# Altium PCB 24V-12V.PcbDoc
Units mm, origin at the board's own origin, x right, y up, seen from the top; angles counter-clockwise.
Board outline 50.6 x 38 mm, 2 copper layers (Top Layer, Bottom Layer); 35 components, 20 nets, 92 pads, 24 vias.
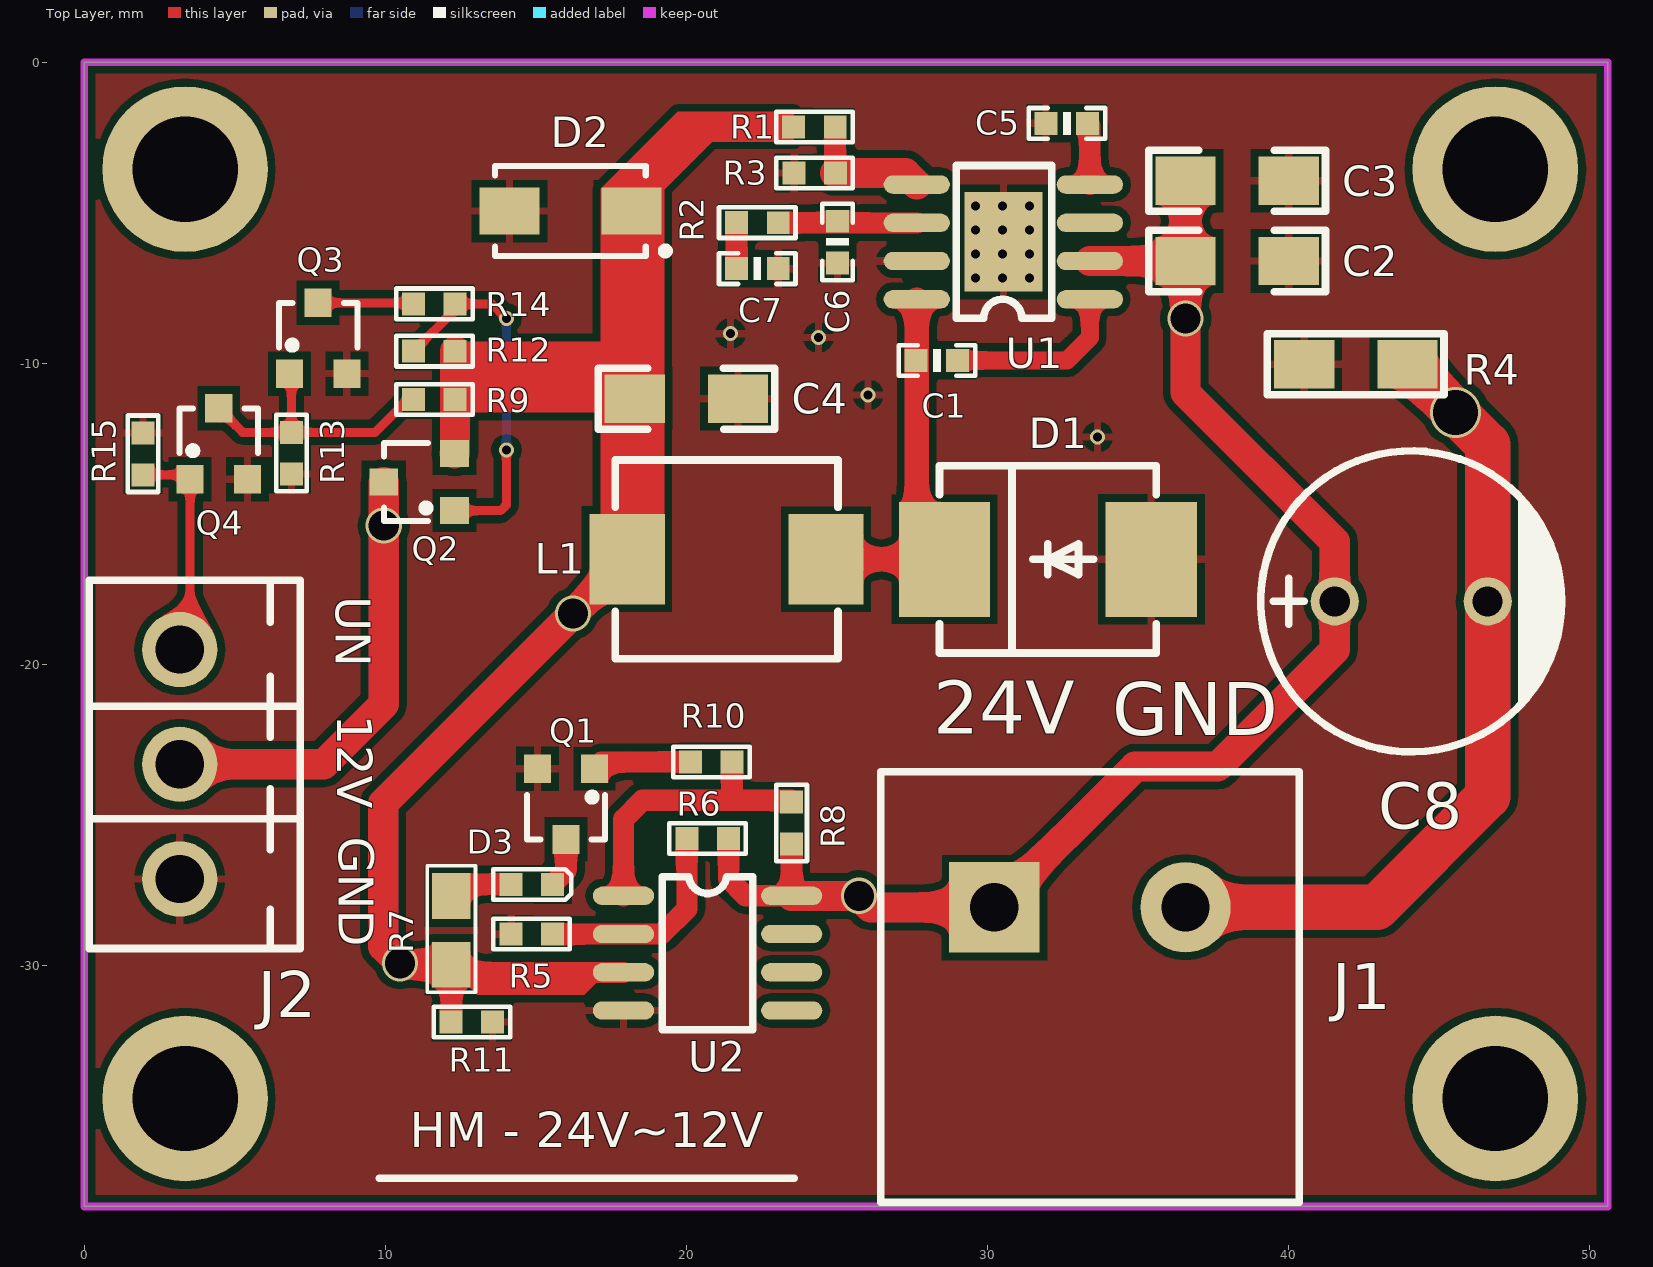
[diagram p0: Top Layer view]
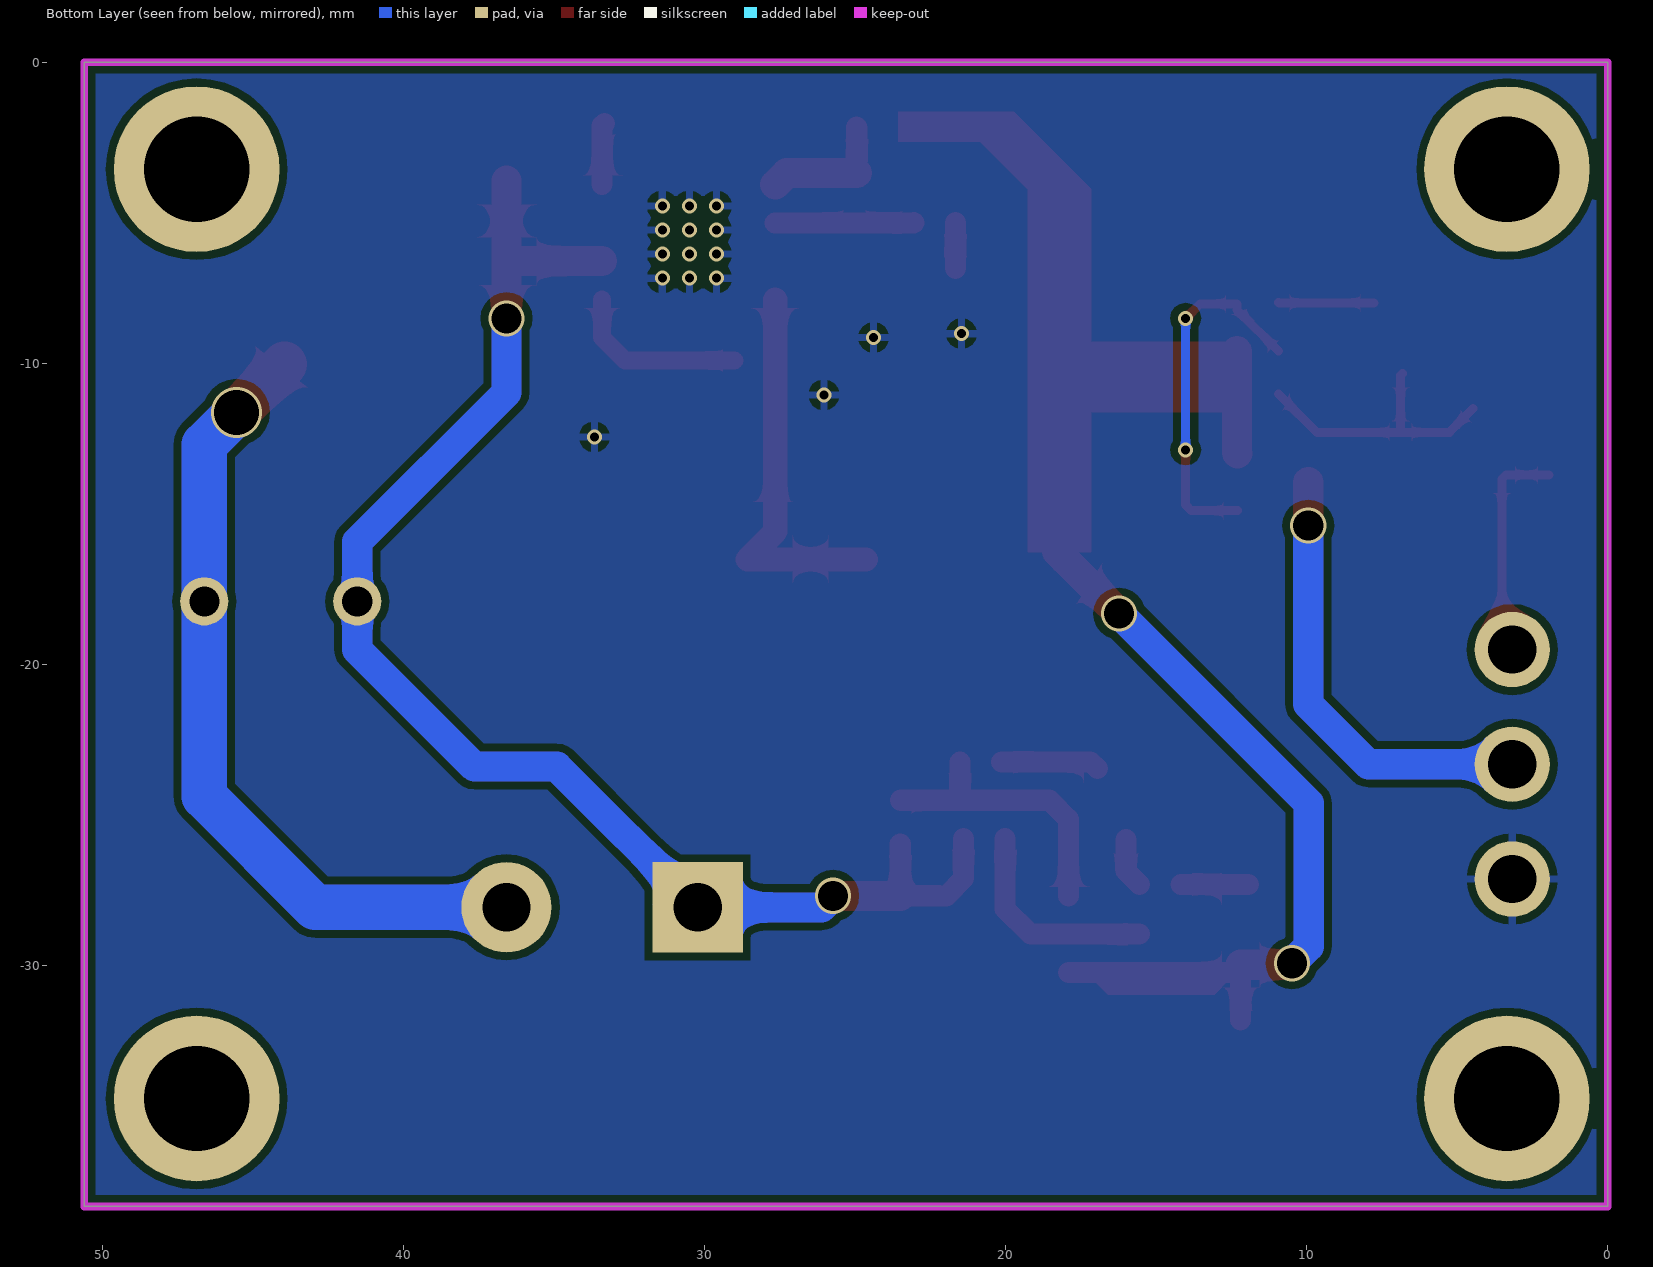
[diagram p1: Bottom Layer view, seen from below]

## Layer stack, top to bottom
Top Solder: solder mask 0.0102, Solder Resist, Dk 3.5
Top Layer: signal copper 0.0356
Dielectric 1: dielectric 0.32, FR-4, Dk 4.8
Bottom Layer: signal copper 0.0356
Bottom Solder: solder mask 0.0102, Solder Resist, Dk 3.5

## Board outline
0,-38 50.6,-38 50.6,0 0,0

## Design rules (kind name [scope] priority, off if disabled: settings)
Clearance [All] p1: gap=0.254
PolygonConnect [All] p1: connectstyle=Relief reliefconductorwidth=0.254 reliefentries=4 polygonreliefangle="90 Angle" airgapwidth=0.254
RoutingVias [All] p1: holewidth=0.3 width=0.5 viastyle="Through Hole" minholewidth=0.3 minwidth=0.5 maxholewidth=1 maxwidth=1.5
SolderMaskExpansion [All] p1: expansion=0.102
Width [All] p1: maxlimit=2 minlimit=0.254 preferedwidth=0.254
30 further rules are at their usual default settings.

## Components (designator, comment, footprint, x,y, rotation, side; value= is the part's Value field where it differs from the comment)
C1 "100NF/50V" 0603_C 28.321,-9.906 r180 top
C2 "10UF/50V" 1206_C 40.005,-6.604 r180 top
C3 "10UF/50V" 1206_C 40.005,-3.937 r180 top
C4 "22UF/25V" 1206_C 21.717,-11.176 r180 top
C5 "8.2NF/50V" 0603_C 32.639,-2.032 r180 top
C6 "10PF/50V" 0603_C 25.019,-5.969 r270 top
C7 "1NF/50V" 0603_C 22.352,-6.858 r0 top
C8 "470UF/35V" EC-DIP_BD10.0-P5.00-D1.0-FD 44.069,-17.907 r0 top
D1 "SK104" SMC/DO214AB 32.004,-16.51 r180 top
D2 "SMAJ12A" SMA/DO214AC 15.85,-6.045 r0 top
D3 "LED红" 0603_D 14.859,-27.305 r0 top
J1 "SIP-2" HB611-6.35-2P 33.401,-28.067 r0 top
J2 "SIP-3" KF2EDGV-3.81-3P 3.175,-19.507 r90 top
L1 "12UH/3A" IND-SMD_0630 21.336,-16.51 r180 top
Q1 "BC817-40" SOT-23-3 16.002,-24.638 r180 top
Q2 "AO3401" SOT-23-3 11.125,-13.945 r90 top
Q3 "AO3400" SOT-23-3 7.772,-9.169 r0 top
Q4 "AO3400" SOT-23-3 4.47,-12.675 r0 top
R1 "10.2KΩ/1%" 0603_R 24.257,-2.159 r180 top
R2 "76.8KΩ/1%" 0603_R 22.352,-5.331 r0 top
R3 "732Ω/1%" 0603_R 24.257,-3.683 r0 top
R4 "0Ω" 1206_R 40.513,-10.033 r0 top
R5 "110KΩ" 0603_R 14.859,-28.956 r0 top
R6 "130KΩ" 0603_R 20.701,-25.781 r0 top
R7 "1.2KΩ" 0805_R 12.192,-27.686 r270 top
R8 "10KΩ" 0603_R 23.495,-25.273 r90 top
R9 "30KΩ/1%" 0603_R 11.633,-11.201 r180 top
R10 "1KΩ" 0603_R 20.828,-23.241 r180 top
R11 "130KΩ" 0603_R 12.878,-31.877 r180 top
R12 "30KΩ/1%" 0603_R 11.633,-9.601 r180 top
R13 "10KΩ/1%" 0603_R 6.883,-12.979 r270 top
R14 "30KΩ/1%" 0603_R 11.633,-8.026 r180 top
R15 "30KΩ/1%" 0603_R 1.956,-13.005 r270 top
U1 "TPS54331" SO-8-POWERPAD（1.27/3.8*5） 33.401,-7.874 r180 top
U2 "DUAL OPAMP" SO-8（1.27/3.8*5） 17.907,-27.686 r0 top

## Footprints (in the part's own frame and the unit in brackets; to place one, negate y for a bottom-side part, rotate by r counter-clockwise, add the part's x,y. Pads: shape width x height; smd on the part's side, far side on the other; paste and mask are expansions set on the pad)
0603_C [mil] "电容"
  rect 30x30 smd: 1(-27,0) 2(27.5,-0.06)
  silkscreen extent -50,-20 50,20
0603_D [mil] "贴片发光二极管"
  rect 30x30 smd: 1(-27,0) 2(27.5,-0.06)
  silkscreen extent -50,-20 52,20
0603_R [mil] "电阻"
  rect 30x30 smd: 1(-27,0) 2(27.5,-0.06)
  silkscreen extent -50,-20 50,20
0805_R [mil] "电阻"
  rect 60x50 smd: 1(0.11,0.06) 2(90.11,0.06)
  silkscreen extent -39,-31 126,32
1206_C [mm] "电容"
  rect 2x1.6 smd: 1(3.432,0.001) 2(0.003,0.001)
  silkscreen extent -1.22,-1.02 4.65,1.02
1206_R [mm] "电阻"
  rect 2x1.6 smd: 1(3.432,0.001) 2(0.003,0.001)
  silkscreen extent -1.22,-1.02 4.65,1.02
EC-DIP_BD10.0-P5.00-D1.0-FD [mm] "直插电解电容"
  round 1.6 hole 1: 1(-2.54,0) 2(2.54,0)
  silkscreen extent -4.99,-5 5.08,5
HB611-6.35-2P [mm]
  rect 3x3 hole 1.6 mask+0.051: 1(-3.175,0)
  round 3 hole 1.6 mask+0.051: 2(3.175,0)
  silkscreen extent -6.95,-9.8 6.95,4.5
IND-SMD_0630 [mm]
  rect 2.5x3 smd: 1(-3.302,0) 2(3.302,0)
  silkscreen extent -3.7,-3.3 3.7,3.3
KF2EDGV-3.81-3P [mm]
  round 2.5 hole 1.6: 1(-7.62,0) 2(-3.81,0) 3(0,0)
  silkscreen extent -9.93,-4 2.3,3
SMA/DO214AC [mm] "二极管"
  rect 2x1.55 smd: 1(-1.725,1.1) 2(2.325,1.1)
  silkscreen extent -2.2,-0.4 3.57,2.6, body extent -2.2,-0.4 2.8,2.6, height 2.69
SMC/DO214AB [mm]
  rect 3.03x3.82 smd: 1(-3.435,0) 2(3.435,0)
  silkscreen extent -3.6,-3.11 3.6,3.11
SO-8-POWERPAD（1.27/3.8*5） [mm]
  oval 2.2x0.61 smd: 1(0.003,0.001) 2(0.003,-1.269) 3(0.003,-2.539) 4(0.003,-3.809) 5(5.75,-3.809) 6(5.75,-2.539) 7(5.75,-1.269) 8(5.75,0.001)
  rect 2.6x3.3 smd: 9(2.87,-1.905)
  silkscreen extent 1.27,-4.44 4.45,0.64
SO-8（1.27/3.8*5） [mil]
  oval 80x24 smd: 1(0.11,0.06) 2(0.11,-49.94) 3(0.11,-99.94) 4(0.11,-149.94) 5(220.11,-149.94) 6(220.11,-99.94) 7(220.11,-49.94) 8(220.11,0.06)
  silkscreen extent 51,-175 169,25
SOT-23-3 [mm]
  rect 0.9x0.95 smd: 1(-0.95,-1.175) 2(0.95,-1.175) 3(0,1.175)
  silkscreen extent -1.3,-0.35 1.3,1.18

## Part data
C1 C2 C3 C4 C5 C6 C7: library part CAP, "无极性电容"
C8: library part "CAP POLAR", "电解电容"
D1: library part Diodes, "肖特基二极管/10A"
D2: library part "Zener diode", "5V 单向TVS"
D3: library part LED, "发光二极管"
J1: "单排2P插座"
J2: "单排3P插座"
L1: library part INDUCTOR, "电感"
Q1: "NPN三极管"
Q2: library part MOSFET_P, "P-Channel MOSFET"
Q3 Q4: library part MOSFET-N, "N-Channel MOSFET"
R1 R2 R3 R4 R5 R6 R7 R8 R9 R10 R11 R12 R13 R14 R15: library part RES2, "电阻"
U1: library part TPS54531, "DC-DC/5A"
U2: "双运放"

## Free pads (board coordinates)
  round 5.5 hole 3.5: 10(3.353,-34.417) 11(3.353,-3.556) 12(46.863,-34.417) 13(46.863,-3.556)

## Via types
v1: diameter 0.5, hole 0.3, Top Layer to Bottom Layer, tented both sides, 18 vias
v2: diameter 1.2, hole 1, Top Layer to Bottom Layer, tented both sides, 5 vias
v3: diameter 1.7, hole 1.5, Top Layer to Bottom Layer, tented both sides, 1 vias

## Nets (pads, with @x,y where several pads share a name; then routed paths per layer and width w, separated by ;. In a path a pad name is that pad's centre, name@x,y a point inside that pad or via, vN(x,y) a via of type N, cw(c..) or ccw(c..) an arc to the next point about the centre after c; other vN are vias at no path point)
12V: C4.1 D2.2 L1.2 Q2.2 R1.2 R7.2 R9.1 R11.2 R12.1 U2.3 | length 52.4
  Top Layer w0.7: R11.2@12.193,-31.81 12.193,-30.225 U2.3
  Top Layer w1: v2@10.468,-29.949 10.493,-29.975 R7.2 ; v2(10.493,-29.924) 9.931,-29.362 9.931,-24.613 v2(16.231,-18.313) L1.2 18.285,-16.259 C4.1 ; Q2.2 12.319,-12.976 R9.1 R12.1 ; v2@16.205,-18.313 v2@16.205,-18.288 ; 17.737,-8.421 17.737,-10.629 C4.1 ; C4.1@18.261,-11.201 C4.1
  Bottom Layer w1: v2(10.493,-29.924) 9.931,-29.362 9.931,-24.613 v2(16.231,-18.313)
24V: C2.1 C3.1 C8.1 J1.1 R6.2 R8.1 U1.2 U2.8 | length 80.5
  Top Layer w0.7: R6.2 21.399,-27.114 21.97,-27.685 U2.8 R8.1@23.498,-25.962
  Top Layer w1: U2.8 v2(25.73,-27.685) 26.113,-28.067 J1.1 34.9,-23.393 37.643,-23.393 41.529,-19.507 C8.1 41.529,-15.926 36.573,-10.97 v2(36.573,-8.509) C2.1 ; U1.2 C2.1 ; C3.1 C2.1
  Bottom Layer w1: v2(25.73,-27.685) 26.113,-28.067 J1.1 34.9,-23.393 37.643,-23.393 41.529,-19.507 C8.1 41.529,-15.926 36.573,-10.97 v2(36.573,-8.509)
AGND: C8.2 J1.2 R4.1 | length 51.8
  Top Layer w1.5: J1.2 42.926,-28.067 46.609,-24.384 C8.2 46.609,-12.696 v3(45.544,-11.631) R4.1
  Bottom Layer w1.5: J1.2 42.926,-28.067 46.609,-24.384 C8.2 46.609,-12.696 v3(45.544,-11.631)
GND: C2.2 C3.2 C4.2 C5.2 C6.2 C7.2 D1.1 D2.1 J2.1 Q1.2 Q3.2 Q4.2 R3.1 R4.2 R5.1 R11.1 R13.2 R15.1 U1.7 U1.9 U2.4
  other v1: 33.655,-12.446 26.035,-11.049 24.384,-9.144 21.463,-9.017 29.601,-7.174 30.501,-7.174 31.401,-7.174 29.601,-6.374 30.501,-6.374 31.401,-6.374 29.601,-5.574 30.501,-5.574 31.401,-5.574 29.601,-4.774 30.501,-4.774 31.401,-4.774
NetC1_1: C1.1 U1.1 | length 6
  Top Layer w0.6: C1.1 32.639,-9.906 33.398,-9.147 U1.1
NetC1_2: C1.2 D1.2 L1.1 U1.8 | length 12.9
  Top Layer w0.8: L1.1 D1.2 27.651,-15.592 U1.8
NetC5_1: C5.1 U1.4 | length 2.1
  Top Layer w0.7: C5.1 33.398,-2.105 U1.4
NetC6_1: C6.1 R2.2 U1.6 | length 4.6
  Top Layer w0.7: R2.2 23.054,-5.335 U1.6
NetC7_1: C7.1 R2.1 | length 1.5
  Top Layer w0.7: C7.1 R2.1
NetD3_1: D3.1 R7.1 | length 2.2
  Top Layer w0.7: R7.1@11.942,-27.305 D3.1
NetD3_2: D3.2 Q1.3 | length 1.7
  Top Layer w0.7: D3.2 16.002,-26.862 Q1.3
NetQ1_1: Q1.1 R10.2 | length 3.3
  Top Layer w0.7: Q1.1 17.176,-23.239 R10.2
NetQ2_1: Q2.1 R12.2 R14.1 | length 12
  Top Layer w0.3: R12.2 12.319,-8.215 R14.1 13.538,-8.026 v1(14.021,-8.509) ; Q2.1 13.833,-14.895 14.021,-14.707 v1(14.021,-12.878)
  Bottom Layer w0.3: v1(14.021,-12.878) v1(14.021,-8.509)
NetQ3_1: Q3.1 Q4.3 R9.2 R13.1 | length 9.3
  Top Layer w0.3: Q4.3 5.264,-12.294 R13.1 ; Q3.1 6.883,-10.405 R13.1 ; R9.2@10.935,-11.022 9.663,-12.294 R13.1
NetQ3_3: Q3.3 R14.2 | length 3.2
  Top Layer w0.3: Q3.3 10.914,-7.994 R14.2@10.935,-7.974
NetR1_1: R1.1 R3.2 U1.5 | length 4.4
  Top Layer w0.7: R3.2@24.943,-3.683 24.943,-2.173 R1.1@24.956,-2.161
  Top Layer w1: R3.2@24.943,-3.683 27.269,-3.683 U1.5
NetR5_2: R5.2 R6.1 U2.2 | length 7.1
  Top Layer w0.7: R5.2 15.561,-28.955 U2.2 19.178,-28.955 20.015,-28.118 R6.1
NetR8_2: R8.2 R10.1 U2.1 | length 9.6
  Top Layer w0.7: U2.1 17.91,-25.143 18.542,-24.511 R8.2@23.497,-24.511 ; 21.514,-24.435 R10.1
POWER: J2.2 Q2.3 | length 28.5
  Top Layer w1: J2.2 7.95,-23.317 9.95,-21.317 v2(9.95,-15.392) Q2.3
  Bottom Layer w1: J2.2 7.95,-23.317 9.95,-21.317 v2(9.95,-15.392)
SIG: J2.3 Q4.1 R15.2 | length 7.4
  Top Layer w0.3: R15.2 3.374,-13.703 Q4.1 3.52,-19.162 J2.3
pads on no net: U1.3 U2.5 U2.6 U2.7

## Polygon pours and split planes (outlines as drawn)
GND on Top Layer "GND" (solid, remove dead copper, pour order 4): 0,0 50.6,0 50.6,-38 0,-38
GND on Bottom Layer "GND" (solid, remove dead copper, pour order 3): 0,0 50.6,0 50.6,-38 0,-38

## Keep-outs
Keep-Out Layer:
  the board outline again, w0.254

## Other copper
Top Layer:
  rectangle net 12V: 12.217,-11.633 17.653,-9.271
  rectangle net 12V: 17.145,-16.281 19.279,-4.216
  region net 12V: 23.558,-2.642 23.558,-1.651 19.71,-1.651 17.145,-4.216 19.279,-4.216 20.853,-2.642
  region net 12V: 17.123,-30.451 16.612,-30.963 13.056,-30.963 12.649,-30.556 12.649,-30.353

## Silkscreen, mask and mechanical layers (free items; w line width, h text height)
Top Overlay:
  lines w0.254: 9.804,-37.059 23.581,-37.059
  text "UN" at 7.976,-17.729 h2 r270
  text "12V" at 8.026,-21.666 h2 r270
  text "24V" at 28.194,-22.885 h3
  text "GND" at 34.138,-22.936 h3
  text "GND" at 8.077,-25.73 h2 r270
  text "HM - 24V~12V" at 10.82,-36.424 h2